# Altium PCB SmartPowerRail.PcbDoc
Units mil, origin at the board's own origin, x right, y up, seen from the top; angles counter-clockwise.
Board outline 6000 x 4000 mil, 2 copper layers (Top Layer, Bottom Layer); 22 components, 14 nets, 52 pads, 0 vias.
Unrouted connection lines stored in the file: 34.
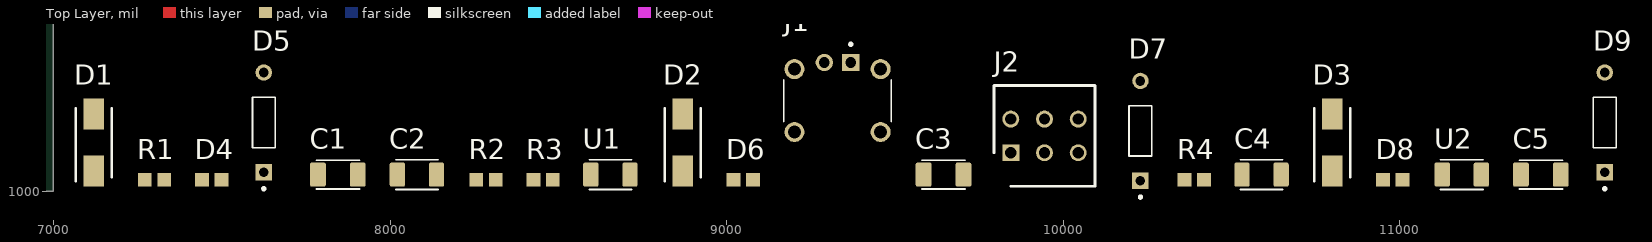
[diagram p0: Top Layer view]
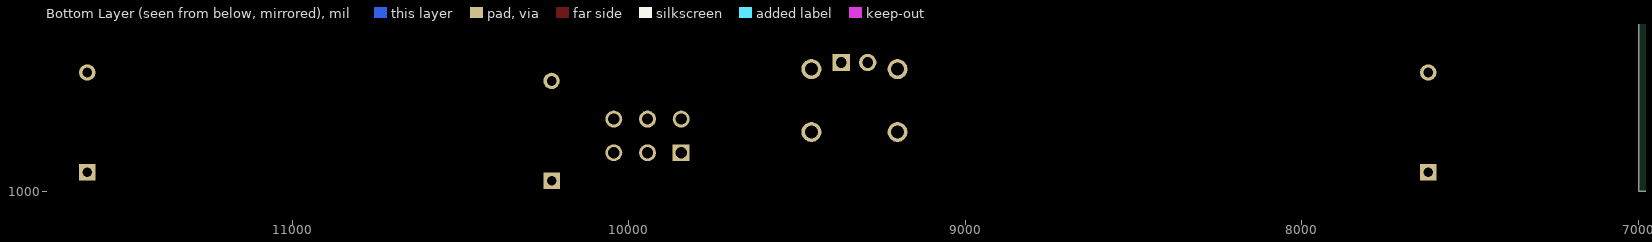
[diagram p1: Bottom Layer view, seen from below]

## Layer stack, top to bottom
Top Solder: solder mask 0.4, Solder Resist, Dk 3.5
Top Layer: signal copper 1.4
Dielectric 1: dielectric 12.6, FR-4, Dk 4.8
Bottom Layer: signal copper 1.4
Bottom Solder: solder mask 0.4, Solder Resist, Dk 3.5

## Board outline
1000,1000 7000,1000 7000,5000 1000,5000

## Design rules (kind name [scope] priority, off if disabled: settings)
Clearance [All] p1: gap=10 ignorepadtopadclearanceinfootprint=FALSE
PolygonConnect [All] p1: connectstyle=Relief reliefconductorwidth=10 reliefentries=4 polygonreliefangle="90 Angle" airgapwidth=10
RoutingVias [All] p1: holewidth=28 width=50 viastyle="Through Hole" minholewidth=28 minwidth=50 maxholewidth=28 maxwidth=50
SolderMaskExpansion [All] p1: expansion=4 istentingtop=FALSE
SupplyNets "Schematic Supply Nets" [InNet('GND')] p1: voltage=0.000
Width [All] p1: maxlimit=10 minlimit=10 preferedwidth=10
30 further rules are at their usual default settings.

## Components (designator, comment, footprint, x,y, rotation, side; value= is the part's Value field where it differs from the comment)
C1 "10uF" RESC3216X125N 7845,1050 r0 top
C2 "0.1uF" CAPC3216X110N 8080,1050 r0 top
C3 "10uF" RESC3216X125N 9645,1050 r0 top
C4 "0.1uF" CAPC3216X110N 10590,1050 r0 top
C5 "10uF" RESC3216X125N 11420,1050 r0 top
D1 "SS14" DIOM5227X270N 7120,1145 r90 top
D2 "SS14" DIOM5227X270N 8870,1145 r90 top
D3 "SS14" DIOM5227X270N 10800,1145 r90 top
D4 "Blue LED" RESC1607X60N 7470,1035 r0 top
D5 "1N4148" DIOAD753W49L380D172B 7625,1205 r90 top
D6 "Red LED" RESC1607X60N 9050,1035 r0 top
D7 "1N4148" DIOAD753W49L380D172B 10230,1180 r90 top
D8 "Green LED" RESC1607X60N 10980,1035 r0 top
D9 "1N4148" DIOAD753W49L380D172B 11610,1205 r90 top
J1 "1x2 Header" HARWIN_M80-8420242 9330,1270 r0 top
J2 "3x2 Header" SHDR6W65P254_2X3_762X762X1150P 9845,1115 r0 top
R1 "430R" RESC1607X60N 7300,1035 r0 top
R2 "20R" RESC1607X60N 8285,1035 r0 top
R3 "48R" RESC1607X60N 8455,1035 r0 top
R4 "150R" RESC1607X60N 10390,1035 r0 top
U1 "LM1117-5V" CAPC3216X110N 8655,1050 r0 top
U2 "LM1117-3.3" CAPC3216X110N 11185,1050 r0 top

## Footprints (in the part's own frame and the unit in brackets; to place one, negate y for a bottom-side part, rotate by r counter-clockwise, add the part's x,y. Pads: shape width x height; smd on the part's side, far side on the other; paste and mask are expansions set on the pad)
CAPC3216X110N [mm]
  rrect25% 1.16x1.82 smd: 1(-1.475,0) 2(1.475,0)
  silkscreen extent -1.6,-1.12 1.6,1.12, body extent -1.6,-0.8 1.6,0.8, height 1.8
DIOAD753W49L380D172B [mm]
  round 1.238 hole 0.73: A(3.768,0)
  rect 1.238x1.238 / inner round 1.238 / far side rect 1.238x1.238 hole 0.73: K(-3.768,0)
  silkscreen extent -5.1,-0.86 1.9,0.86, body extent -4,-0.95 4,0.95, height 1.91
DIOM5227X270N [mm]
  rect 2.35x1.55 smd: 1(-2.15,0) 2(2.15,0)
  silkscreen extent -2.93,-1.36 2.6,1.36, body extent -1.8,-0.9 1.8,0.9, height 1.43
HARWIN_M80-8420242 [mm]
  rect 1.308x1.308 / inner round 1.308 / far side rect 1.308x1.308 hole 0.8: 1(1,2.875)
  round 1.308 hole 0.8: 2(-1,2.875)
  round 1.508 hole 1: SH1(-3.25,2.375) SH2(3.25,2.375) SH3(-3.25,-2.375) SH4(3.25,-2.375)
  silkscreen extent -4.05,-1.58 4.05,4.35
RESC1607X60N [mm]
  rect 1.04x1.02 smd: 1(-0.735,0) 2(0.735,0)
  body extent -0.8,-0.4 0.8,0.4, height 0.55
RESC3216X125N [mm]
  rrect25% 1.2x1.82 smd: 1(-1.505,0) 2(1.505,0)
  silkscreen extent -1.63,-1.09 1.63,1.09, body extent -1.6,-0.8 1.6,0.8, height 1.8
SHDR6W65P254_2X3_762X762X1150P [mm]
  rect 1.275x1.275 / inner round 1.275 / far side rect 1.275x1.275 hole 0.85: 1(0,0)
  round 1.275 hole 0.85: 2(0,2.54) 3(2.54,0) 4(2.54,2.54) 5(5.08,0) 6(5.08,2.54)
  silkscreen extent -1.27,-2.54 6.35,5.08

## Part data
C1 C3 C5: library part T491B106K016AT, "CAP TANT 10UF 10% 16V 1411", Case Code (Imperial)=1411, Case Code (Metric)=3528, Dielectric Material=Tantalum, ESR (Equivalent Series Resistance)=2.8R, Leakage Current=1.6uA, Max Operating Temperature=125°C, Min Operating Temperature=-55°C, Package Quantity=1, Ripple Current=174mA, Tolerance=10%, Voltage=16V, Capacitance=10uF, Case/Package=1411, Depth=2.8mm, Dissipation Factor=6%, Features="General Purpose", Height=1.9mm, Height - Seated (Max)=0.083inch, Lead Free="Lead Free", Lead Pitch=1.9mm, Length=3.5mm, Life (Hours)=2000Hour, Mount="Surface Mount", Number of Pins=2, Packaging="Tape and Reel", Polarity=Polar, REACH SVHC="No SVHC", RoHS Compliant=Yes, Termination=SMD/SMT, Voltage Rating=16V, Voltage Rating (DC)=16V, Width=0.11inch
C2 C4: library part T491A104K035AT, "CAP TANT 0.1UF 10% 35V 1206", Capacitance=100nF, Case Code (Imperial)=1206, Case Code (Metric)=3216, Dielectric Material=Tantalum, ESR (Equivalent Series Resistance)=20R, Leakage Current=500nA, Max Operating Temperature=125°C, Min Operating Temperature=-55°C, Package Quantity=1, Ripple Current=61mA, Tolerance=10%, Voltage=35V, Case/Package=1206, Construction=Flat, Depth=1.6mm, Dissipation Factor=4%, Features="General Purpose", Height=1.6mm, Height - Seated (Max)=0.071inch, Lead Free="Lead Free", Lead Pitch=1.2mm, Length=3.2mm, Life (Hours)=2000Hour, Mount="Surface Mount", Number of Pins=2, Packaging="Tape and Reel", Polarity=Polar, Radiation Hardening=No, REACH SVHC="No SVHC", RoHS Compliant=Yes, Series=T491, Size=1.6mm, Termination=SMD/SMT, Voltage Rating=35V, Voltage Rating (DC)=35V, Weight=0.000571oz, Width=1.6mm
D1 D2 D3: "DIODE SCHOTTKY 40V 1A SMA", Forward Current=1A, Manufacturer="ON Semiconductor", Max Junction Temp=+125°C, Max Repetitive Reverse Voltage=40V, Max Surge Forward Current=40A, Package=403AE, Peak Reverse Current=0.2mA, Temperature="-65°C to +125°C", Temperature Range Low=-65°C, Automotive=No, Category=Diode, ComponentLink2Description=Datasheet, ComponentLink2URL=https://www.onsemi.com/pub/Collateral/SS19-D.PDF, Device Class L1="Discrete Semiconductors", Device Class L2=Diodes, Device Class L3="Schottky Diodes", Digikey Description="DIODE SCHOTTKY 40V 1A SMA", Height=2.5mm, Lead Free=Yes, Manufacturer Part Number=SS14, Mouser Description="Schottky Diodes & Rectifiers SMA 40V 1.0A", Octopart=https://octopart.com/ss14-on+semiconductor-29205033, RoHS=TRUE, Standoff Height=0.05mm, Temperature Range High=+125°C
D4 D6 D8: library part LTT-C190KBKT, "LED BLUE CLEAR CHIP SMD", Case Code (Imperial)=0603, Case Code (Metric)=1608, Color=Red, Forward Current=30mA, Forward Voltage=2.4V, Lens Color=Colorless, Max Operating Temperature=85°C, Min Operating Temperature=-55°C, Package Quantity=1, Power Dissipation=75mW, Reverse Voltage=5V, Test Current=20mA, Case/Package=0603, Depth=0.8mm, Dominant Wavelength=631nm, Height=0.8mm, Illumination Color=Red, Lead Free="Lead Free", Length=1.6mm, Lens Style=Diffused, Lens Transparency=Clear, Luminous Intensity=54mcd, Mount="Surface Mount", Number of Elements=1, Number of LEDs=1, Number of Pins=2, Packaging="Tape and Reel", Power Rating=75mW, Radiation Hardening=No, Viewing Angle=130°, Wavelength=639nm, Width=0.8mm
D5 D7 D9: "DIODE GEN PURP 100V 200MA DO35", Average Rectified Current=200mA, Capacitance=4pF, Case/Package=DO-35, Current=4A, Forward Current=300mA, Forward Voltage=1V, Max Forward Surge Current (Ifsm)=1A, Max Operating Temperature=175°C, Max Power Dissipation=500mW, Max Repetitive Reverse Voltage (Vrrm)=100V, Max Reverse Current=5uA, Min Operating Temperature=-65°C, Package Quantity=2000, Contact Plating=Tin, Current Rating=200mA, Diameter=1.91mm, Element Configuration=Single, Height=4.56mm, Lead Free="Lead Free", Length=4.56mm, Max Reverse Voltage (DC)=100V, Max Surge Current=4A, Mount="Through Hole", Number of Pins=2, Output Current=200mA, Outside Diameter=1.85mm, Packaging=Bulk, Peak Non-Repetitive Surge Current=4A, Polarity=Standard, Power Dissipation=500mW, Radiation Hardening=No, REACH SVHC="No SVHC", Recovery Time=4ns, Reverse Recovery Time=4ns, Reverse Voltage=100V, Series=-, Voltage=100V, Voltage Rating (DC)=100V, Weight=0.01lb, Width=1.91mm
J1: library part 3bc925449376181038e59eaffc5286c, "CONN HEADER R/A 2POS 2MM", Case/Package=SIL, Color=Black, Contact Resistance=25mR, Current Rating=3A, Insulation Resistance=100MR, Max Operating Temperature=125°C, Max Voltage Rating (AC)=120V, Min Operating Temperature=-55°C, Package Quantity=32, Connector Type=Plug, Contact Gender=Male, Contact Material=Bronze, Contact Plating=Gold, Contact Type="Male Pin", Fastening Type=Latch, Gender=Male, Housing Color=Black, Housing Material=Polyamide, Length=7.6mm, Max Current Rating=3A, Mount="Through Hole", Number of Contacts=2, Number of Positions=2, Number of Rows=1, Orientation="Right Angle", Packaging=Rail/Tube, Pitch=2mm, Radiation Hardening=No, REACH SVHC="No SVHC", RoHS Compliant=Yes, Series="Datamate L-Tek", Termination=Solder, Voltage Rating=120V
J2: library part 281739-3, "3X2 connector", Package=None, Availability=Unavailable, Component Type=Standard, Design Item ID=281739-3, MP=281739-3, Pin Count=6, Price=None, Source=281739-3.SchLib
R1: library part "RES 430 Ohm", "430 Ohm SMD 0603 Resistor", Manufacturer=Panasonic, Part Number=ERJ-3GEYJ431V
R2: library part "RES 20  Ohm", "20 ohm resistor SMD 0603", Manufacturer=YAGEO, Part Number=RC0603FR-1020RL
R3: library part "RES  48 Ohms", "Resistor 48 Ohms SMD 0603", Manufacturer=Panasonic, Part Number=ERJ-L03UJ48MV
R4: library part "RES 150 Ohm_1", "150 ohm resistor SMD 0603", Manufacturer=Panasonic, Part Number=ERA3AEB151V
U1 U2: library part LM1117-3.3_1, "SOT-223 LM1117-3.3", Package="SOT-223-4 Texas Instruments", Availability=Unavailable, Component Type=Standard, Design Item ID=LM1117-3.3, MF="Texas Instruments", MP=LM1117-3.3, Pin Count=4, Price=None, SnapEDA_Link=https://www.snapeda.com/parts/LM1117-3.3/Texas%20Instruments/view-part/549181/?ref=snap, Source=SnapEDAsch.SchLib

## Nets (pads, with @x,y where several pads share a name; then routed paths per layer and width w, separated by ;. In a path a pad name is that pad's centre, name@x,y a point inside that pad or via, vN(x,y) a via of type N, cw(c..) or ccw(c..) an arc to the next point about the centre after c; other vN are vias at no path point)
GND: C1.1 C2.1 C3.2 C4.1 C5.2 D4.1 D5.A D6.1 D7.A D8.1 D9.A J1.2 U1.1 U2.1
NetC1_2: C1.2 J1.1 J2.5
NetC2_2: C2.2 C3.1 J2.3 U1.2
NetC4_2: C4.2 C5.1 J2.1 U2.2
NetD1_1: D1.1 J2.6
NetD1_2: D1.2 R1.1
NetD2_1: D2.1 J2.4
NetD2_2: D2.2 R2.1
NetD3_1: D3.1 J2.2
NetD3_2: D3.2 R4.1
NetD4_2: D4.2 D5.K R1.2
NetD6_2: D6.2 D7.K R3.2
NetD8_2: D8.2 D9.K R4.2
NetR2_2: R2.2 R3.1
pads on no net: J1.SH1 J1.SH2 J1.SH3 J1.SH4